# Altium PCB PCB3.PcbDoc
Units mil, origin at the board's own origin, x right, y up, seen from the top; angles counter-clockwise.
Board outline 1136.3 x 1744.47 mil, 2 copper layers (Top Layer, Bottom Layer); 11 components, 19 nets, 42 pads, 2 vias.
Unrouted connection lines stored in the file: 4.
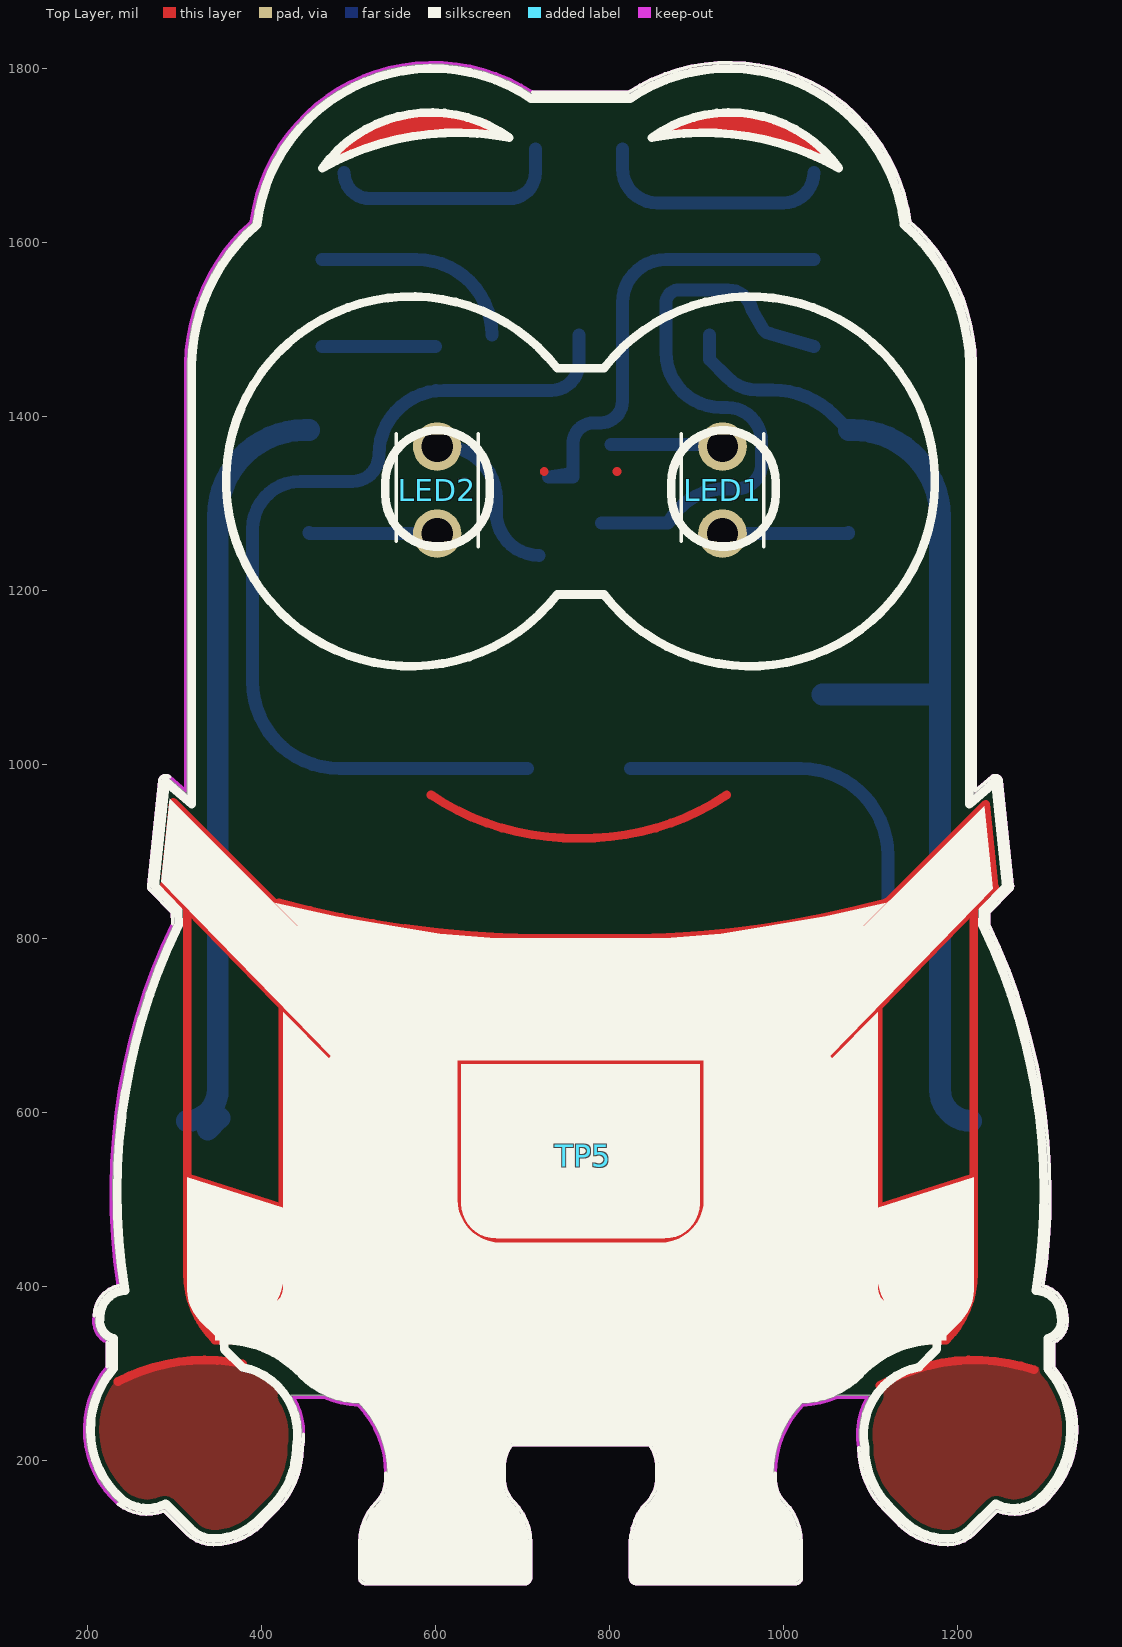
[diagram p0: Top Layer view]
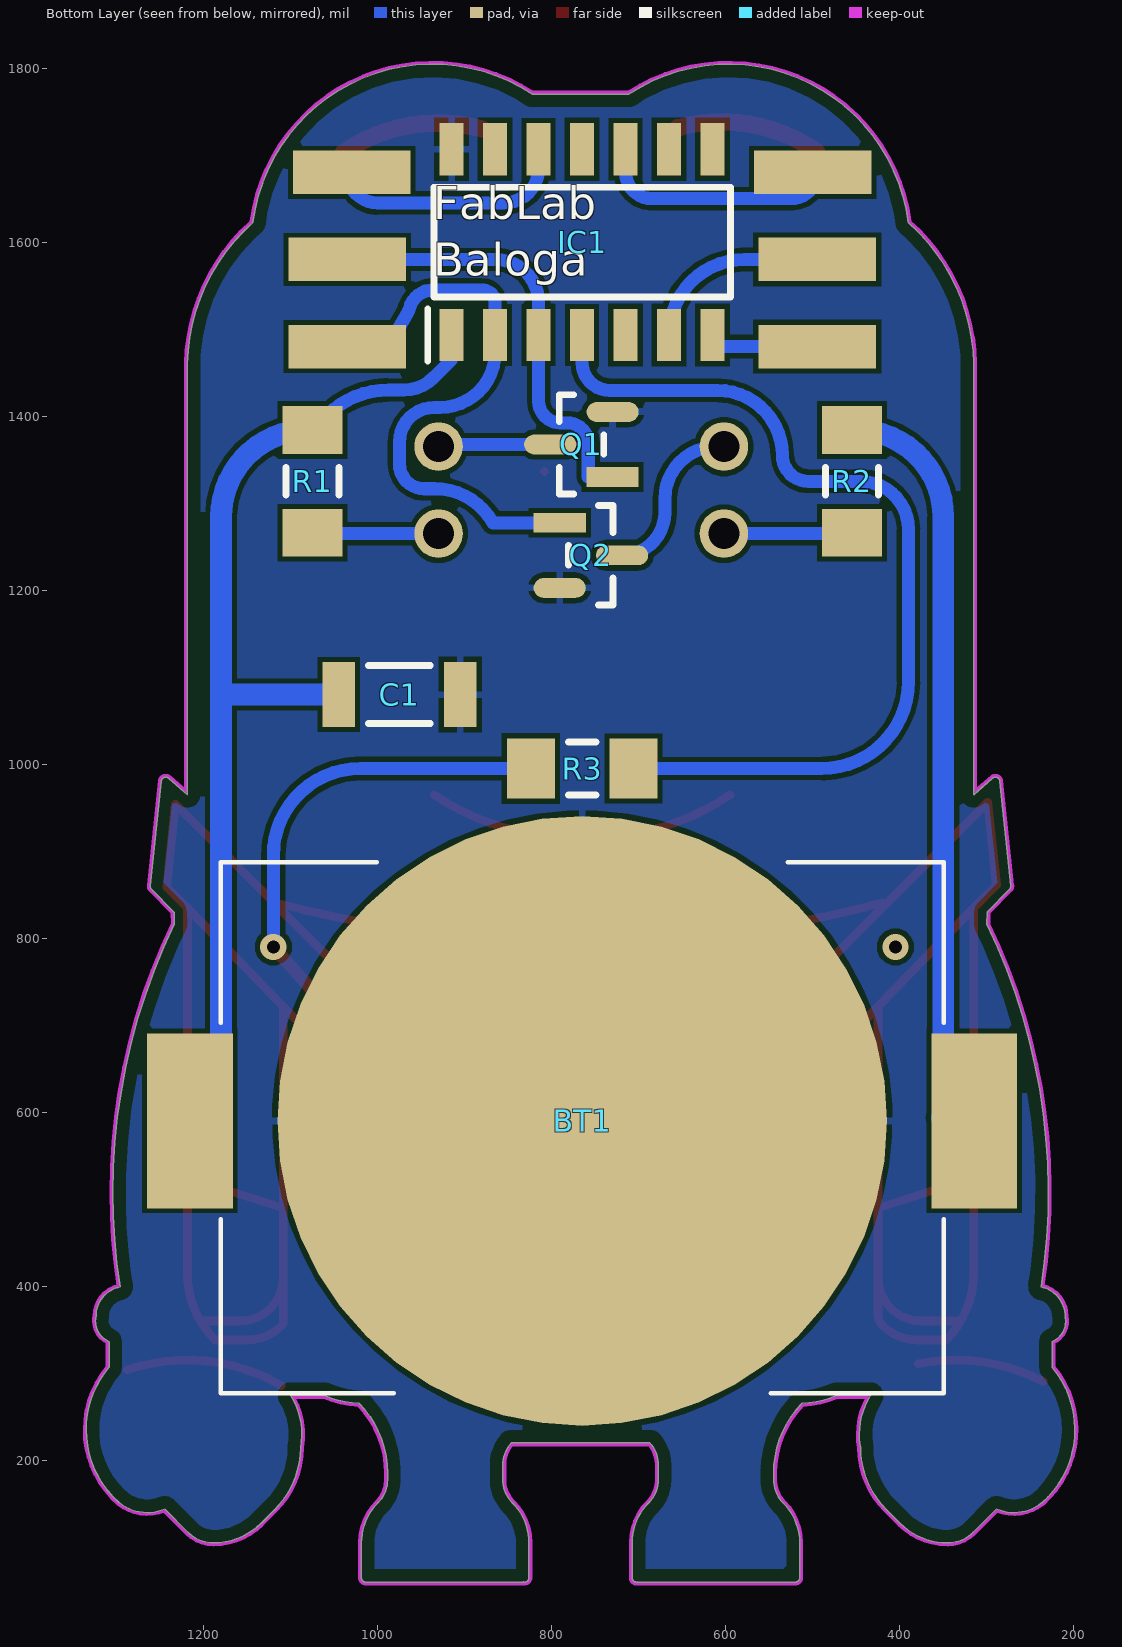
[diagram p1: Bottom Layer view, seen from below]
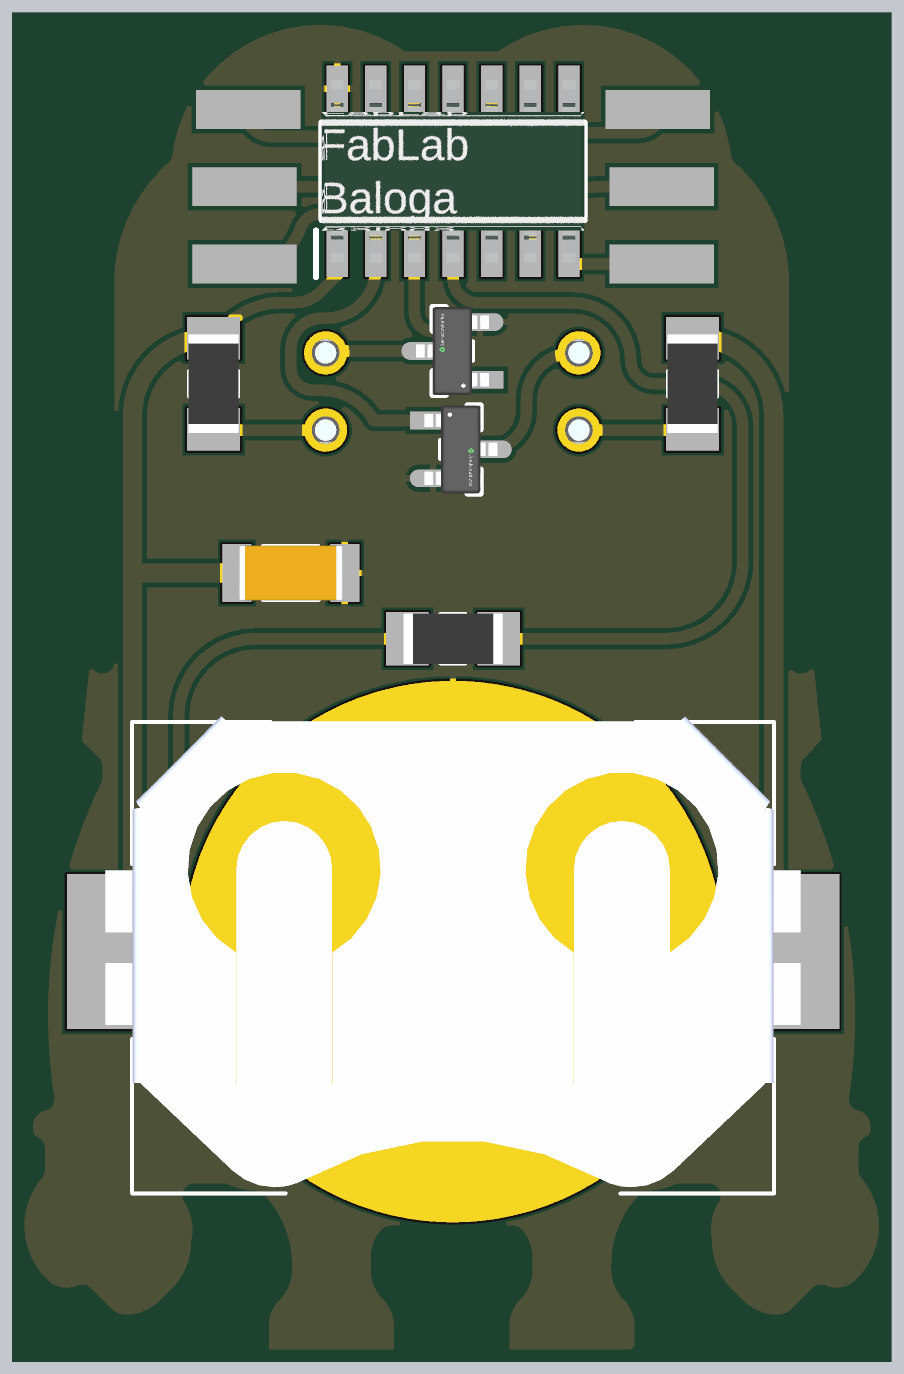
[diagram p2: 3D render of the assembled board from below, using the file's embedded part models]

## Layer stack, top to bottom
Top Solder: solder mask 0.4, Solder Resist, Dk 3.5
Top Layer: signal copper 1.4
Dielectric 1: dielectric 12.6, FR-4, Dk 4.8
Bottom Layer: signal copper 1.4
Bottom Solder: solder mask 0.4, Solder Resist, Dk 3.5

## Board outline
345,104.99 ccw(c345,182.43) 399.76,127.67 415.24,143.15 415.26,143.17 ccw(c343.43,215) 445.01,214.52 ccw(c362.93,230) 446.46,230 ccw(c362.93,230) 433.63,274.49 472.51,274.49 ccw(c514.64,366.92) 512.52,265.36 cw(c429.29,185) 544.99,185 544.99,177.43 cw(c507.93,177.43) 534.13,151.22 ccw(c580.36,105) 514.99,105 514.99,65 ccw(c520,65) 520,59.98 700,59.98 ccw(c700,65) 701.25,60.14 ccw(c702.5,65) 707.51,65 707.51,105 ccw(c642.14,105) 688.37,151.22 cw(c714.57,177.43) 677.51,177.43 677.51,194.82 cw(c715.18,194.82) 687.15,219.99 846.54,219.99 cw(c818.52,194.82) 856.18,194.82 856.18,177.43 cw(c819.13,177.43) 845.33,151.22 ccw(c891.55,105) 826.18,105 826.18,65 ccw(c831.2,65) 832.45,60.14 ccw(c833.7,65) 833.7,59.98 1013.7,59.98 ccw(c1013.7,65) 1018.71,65 1018.71,105 ccw(c953.34,105) 999.57,151.22 cw(c1025.77,177.43) 988.71,177.43 988.71,185 cw(c1104.41,185) 1021.18,265.36 ccw(c1019.05,366.92) 1061.19,274.49 1100.07,274.49 ccw(c1170.77,230) 1088.68,214.52 ccw(c1190.27,215) 1118.44,143.17 1118.45,143.15 1133.94,127.67 ccw(c1188.7,182.43) 1188.7,104.99 ccw(c1188.7,146.21) 1217.85,117.06 1244.75,143.96 ccw(c1264.87,190.83) 1296.84,151.09 ccw(c1293.71,154.99) 1297.03,151.25 ccw(c1223.7,235) 1335.01,235 ccw(c1223.7,235) 1308.71,306.86 1308.71,336.41 ccw(c1298.7,360) 1324.33,360 ccw(c1298.7,360) 1323.72,365.55 ccw(c1289.69,365.69) 1323.72,365.69 ccw(c1289.66,365.69) 1296.12,399.14 ccw(c594.79,507.5) 1304.44,507.5 ccw(c594.77,507.5) 1233.81,816.15 1234.03,829.86 1259.93,856.24 ccw(c1256.36,859.75) 1261.37,859.75 ccw(c1256.39,859.76) 1261.34,860.3 1248.69,980.5 ccw(c1243.7,980) 1240.41,983.79 1218.71,964.98 1218.71,1460 ccw(c1214.49,1460.01) 1218.71,1460.11 ccw(c995.73,1455.41) 1143.44,1622.51 ccw(c936.91,1596.3) 822.18,1770.02 711.52,1770.02 ccw(c596.78,1596.3) 390.25,1622.51 ccw(c537.96,1455.41) 314.99,1460.11 ccw(c319.87,1460) 314.98,1460 314.98,964.98 293.28,983.79 ccw(c290,980) 285.01,980.5 272.36,860.3 ccw(c277.34,859.75) 273.76,856.24 299.67,829.86 299.89,816.15 ccw(c938.93,507.5) 237.58,399.14 ccw(c244.04,365.69) 209.98,365.55 ccw(c235,360) 224.98,336.41 224.98,306.86 ccw(c310,235) 236.67,151.25 ccw(c242.77,158.19) 236.7,151.23 236.67,151.25 ccw(c240.1,155.12) 236.86,151.09 ccw(c268.83,190.83) 288.95,143.96 315.83,117.08 315.85,117.06 ccw(c345,146.21)

## Design rules (kind name [scope] priority, off if disabled: settings)
BoardOutlineClearance [All] p1: gap=15 ignorepadtopadclearanceinfootprint=FALSE
Clearance [All] p1: gap=6 ignorepadtopadclearanceinfootprint=FALSE except(0: Arc-Hole Track-Hole SMDPad-Hole THPad-Hole Via-Hole Fill-Hole Poly-Hole Region-Hole Text-Hole)
ComponentClearance [All] p1: gap=1 collisioncheckmode=3 verticalgap=1 showdistances=FALSE
DiffPairsRouting [All] p1: maxlimit=393.7 minlimit=6 mostfreqgap=8 toplayer_minwidth=6 toplayer_maxwidth=15 toplayer_prefwidth=8 bottomlayer_minwidth=6 bottomlayer_maxwidth=15 bottomlayer_prefwidth=8 maxuncoupledlength=500
HoleSize [All] p1: absolutevalues=TRUE maxlimit=265 minlimit=13 maxpercent=80.000 minpercent=20.000
HoleToHoleClearance [All] p1: gap=10 allowstackedmicrovias=FALSE
MinimumAnnularRing [All] p1: minimumring=7
MinimumSolderMaskSliver [All] p1: minsoldermaskwidth=0
PlaneClearance [All] p1: clearance=10
PlaneConnect [All] p1: planeconnectstyle=Direct reliefexpansion=16 reliefentries=4 reliefconductorwidth=6 reliefairgap=6
PolygonConnect [All] p1: connectstyle=Relief reliefconductorwidth=8 reliefentries=4 polygonreliefangle="90 Angle" airgapwidth=6
RoutingCorners [All] p1: cornerstyle=45-Degree minsetback=49.21 maxsetback=49.21
RoutingVias [All] p1: holewidth=15 width=30 viastyle="Through Hole" minholewidth=13 minwidth=27 maxholewidth=100 maxwidth=114
SilkToSilkClearance [All] p1: silktosilkclearance=0
SilkToSolderMaskClearance [IsPad] p1: minsilkscreentomaskgap=6 clearancetoexposedcopper=TRUE
SolderMaskExpansion [All] p1: expansion=2.95 istentingtop=FALSE
Width [All] p1: maxlimit=400 minlimit=6 preferedwidth=8
20 further rules are at their usual default settings.

## Classes and differential pairs
component class Sheet1: C1 IC1 LED1 LED2 Q1 Q2 R1 R2 R3 TP5

## Components (designator, comment, footprint, x,y, rotation, side; value= is the part's Value field where it differs from the comment)
BT1 "BAT-HLD-001" BAT_BAT-HLD-001 765,590 r180 bottom
C1 "Capacitor 1 uF +/- 10% 25 V 1206" CAPC3216X180X20ML20 975,1080 r180 bottom value=1µF
IC1 "ATTINY404-SSN" SOIC127P600X175-14N 765,1600 r90 bottom
LED1 "L-2060HD" L2060HD 930,1365 r0 top
LED2 "L-2060HD" L2060HD 602.1,1365 r0 top
Q1 "BSS138" FP-318-08-IPC_B 765.83,1367.4 r0 bottom
Q2 "BSS138" FP-318-08-IPC_B 755,1240 r180 bottom
R1 "Resistor 1k +/-1% 1206 250 mW" RESC3116X70X50ML13T20 1075,1325 r90 bottom value=30-70R
R2 "Resistor 1k +/-1% 1206 250 mW" RESC3116X70X50ML13T20 455,1325 r90 bottom value=30-70R
R3 "Resistor 1k +/-1% 1206 250 mW" RESC3116X70X50ML13T20 765,995 r0 bottom value=30-70R
TP5 "TPAD6R" TP06R 770,550 r90 top

## Footprints (in the part's own frame and the unit in brackets; to place one, negate y for a bottom-side part, rotate by r counter-clockwise, add the part's x,y. Pads: shape width x height; smd on the part's side, far side on the other; paste and mask are expansions set on the pad)
BAT_BAT-HLD-001 [mm]
  round 17.8 smd paste-10: N1(0,0)
  rect 2.5x5.1 smd: P1(-11.45,0) P2(11.45,0)
  silkscreen extent -10.55,-7.95 10.55,7.55, body extent -11.43,-7.75 11.43,7.75, height 4.32
CAPC3216X180X20ML20 [mm] "Chip Capacitor, 2-Leads, Body 3.40x1.80mm, IPC Low Density"
  rect 0.95x1.9 smd: 1(-1.775,0) 2(1.775,0)
  silkscreen extent -0.9,-0.85 0.9,0.85, body extent -1.7,-0.9 1.7,0.9, height 1.8
FP-318-08-IPC_B [mm]
  rect 1.524x0.578 smd paste+0 mask+0: 1(-0.91,0.95)
  rrect100% 1.524x0.578 smd paste+0 mask+0: 2(-0.91,-0.95) 3(0.91,0)
  silkscreen extent -0.65,-1.45 0.65,1.45, body extent -1.2,-1.45 1.2,1.45, height 1.11
L2060HD [mm]
  round 1.416 hole 0.91: 1(0,0) 2(0,-2.54)
  silkscreen extent -1.2,-2.92 1.2,0.38, body extent -1.2,-2.92 1.2,0.38, height 4.45
RESC3116X70X50ML13T20 [mm] "Chip Resistor, 2-Leads, Body 3.25x1.65mm, IPC Low Density"
  rect 1.4x1.75 smd: 1(-1.5,0) 2(1.5,0)
  silkscreen extent -0.4,-0.77 0.4,0.77, body extent -1.63,-0.82 1.63,0.82, height 0.7
SOIC127P600X175-14N [mm]
  rect 1.525x0.7 smd: 1(-2.712,3.81) 2(-2.712,2.54) 3(-2.712,1.27) 4(-2.712,0) 5(-2.712,-1.27) 6(-2.712,-2.54) 7(-2.712,-3.81) 8(2.712,-3.81) 9(2.712,-2.54) 10(2.712,-1.27) 11(2.712,0) 12(2.712,1.27) 13(2.712,2.54) 14(2.712,3.81)
  silkscreen extent -3.47,-4.33 1.6,4.51, body extent -3,-4.33 3,4.33, height 1.75
TP06R [mm] "Testpoint, round, d=0.6mm"
  round 0.6 smd paste-1: 1(0,0)

## Part data
BT1: "Battery Retainer Coin, 20.0mm 1 Cell SMD (SMT) Tab", Package=None, Availability=Unavailable, MF="{'manufacturer': u'Linx'}", MP=BAT-HLD-001, Price=None
C1: library part CMP-001-00006-5, "Chip Capacitor, 1 uF, +/- 10%, 25 V, 1206 (3216 Metric)", Capacitor Type=Ceramic, Case/Package=1206, Max Operating Temperature=125°C, Min Operating Temperature=-55°C, Tolerance=10%, Voltage Rating=25V, Mounting Technology=SM, Pins=2, RoHS Compliant=True
IC1: "Integrated Circuit", Manufacturer_Name=Microchip, Mouser Part Number=579-ATTINY404-SSN, Arrow Part Number=ATTINY404-SSN, Arrow Price/Stock=https://www.arrow.com/en/products/attiny404-ssn/microchip-technology?region=nac, Datasheet Link=https://componentsearchengine.com/Datasheets/2/ATTINY404-SSN.pdf, Height=1.75mm, Manufacturer_Part_Number=ATTINY404-SSN, Mouser Price/Stock=https://www.mouser.co.uk/ProductDetail/Microchip-Technology/ATTINY404-SSN?qs=3HJ2avRr9PJ8OrTjUlXZkg%3D%3D
LED1 LED2: "LED", Manufacturer_Name=Kingbright, Datasheet Link=https://componentsearchengine.com/Datasheets/2/L-2060HD.pdf, Height=4.35mm, Manufacturer_Part_Number=L-2060HD
Q1 Q2: library part CMP-07173-000101-1, "MOSFET N-CH 50V 220MA SOT-23", Case/Package=SOT-23, Continuous Drain Current (ID)=220mA, Drain to Source Breakdown Voltage=50V, Drain to Source Resistance=3.5R, Gate to Source Voltage (Vgs)=20V, Input Capacitance=27pF, Max Operating Temperature=150°C, Max Power Dissipation=360mW, Min Operating Temperature=-55°C, On-State Resistance=6R, Package Quantity=1, Threshold Voltage=1.3V, Contact Plating=Tin, Current Rating=220mA, Drain to Source Voltage (Vdss)=50V, Dual Supply Voltage=50V, Element Configuration=Single, Fall Time=9ns, Height=0.93mm, Lead Free="Lead Free", Length=2.92mm, Mount="Surface Mount", Nominal Vgs=1.3V, Number of Elements=1, Number of Pins=3, Packaging="Tape and Reel", Power Dissipation=360mW, Radiation Hardening=No, Rds On Max=3.5R, REACH SVHC="No SVHC", Rise Time=9ns, Termination=SMD/SMT, Turn-Off Delay Time=20ns, Turn-On Delay Time=2.5ns, Voltage Rating (DC)=50V, Weight=0.03g, Width=1.3mm
R1 R2 R3: library part CMP-009-00011-4, "Chip Resistor, 1 KOhm, +/- 1%, 0.25 W, -55 to 155 degC, 1206 (3216 Metric)", Case/Package=1206, Max Operating Temperature=155°C, Min Operating Temperature=-55°C, Power=250mW, Tolerance=1%, Voltage Rating=200V, Mounting Technology=SM, Pins=2, RoHS Compliant=True
TP5: library part CMP-00028-00002-1, "Touchpad", Pins=1

## Free pads (board coordinates)
  rect 135.04x50 smd far side paste+0 mask+0: 2(495,1580) 2(500,1680) 2(1030,1680) 2(1035,1480) 2(1035,1580) 3(495,1480)

## Via types
v1: diameter 30, hole 15, Top Layer to Bottom Layer, 2 vias

## Nets (pads, with @x,y where several pads share a name; then routed paths per layer and width w, separated by ;. In a path a pad name is that pad's centre, name@x,y a point inside that pad or via, vN(x,y) a via of type N, cw(c..) or ccw(c..) an arc to the next point about the centre after c; other vN are vias at no path point)
AIN4/PWM4: IC1.2 pad.2@1035,1480 Q2.1 | length 672.2
  Bottom Layer w15: Q2.1 867.61,1277.4 cw(c934.12,1240.46) 935.02,1316.54 946.54,1316.54 ccw(c946.54,1345) 975,1345 975,1370 ccw(c935,1370) 935,1410 928.23,1410 cw(c928.23,1473.23) 865,1473.23 IC1.2 865,1530 cw(c880,1530) 880,1545 936.37,1545 cw(c936.43,1517.16) 963.47,1523.78 ccw(c978.01,1527.47) 965,1520 976.5,1499.98 980.63,1495.85 984.32,1494.78 pad.2@1035,1480
AIN5/PWM5: IC1.3 pad.2@1035,1580 Q1.1 | length 535.8
  Bottom Layer w15: Q1.1@752.95,1333.6 cw(c730,1405) 752.58,1333.48 752.5,1333.48 Q1.1 758.04,1330 758.04,1370.14 cw(c782.21,1368.02) 782.21,1392.28 790.17,1392.28 ccw(c790.17,1417.11) 815,1417.11 IC1.3 815,1530 cw(c865,1530) 865,1580 pad.2@1035,1580
AIN6: IC1.4 R3.1 | length 1064.1
  Bottom Layer w15: R3.1 490,995 cw(c490,1095) 390,1095 390,1270 cw(c445,1270) 445,1325 505,1325 ccw(c505,1355) 535,1355 cw(c609.68,1355) 609.68,1429.68 733.36,1429.68 ccw(c733.36,1461.32) 765,1461.32 IC1.4
AIN7: IC1.5
EXTCLK/SCK: IC1.13
GND: BT1.N1 C1.2 IC1.14 Q1.2 Q2.2 | length 331.2
  Top Layer w10: 235.19,290.41 cw(c335.51,99.9) 378.7,310.83 ; 1110.93,286 cw(c1219.21,99.9) 1287.92,303.95
MISO: IC1.12 pad.2@1030,1680 | length 284.6
  Bottom Layer w15: IC1.12 815,1685 ccw(c855,1685) 855,1645 1000,1645 ccw(c1000,1680) pad.2@1035,1680
MOSI: IC1.11
NetLED1_1: LED1.1 Q1.3 | length 129.7
  Bottom Layer w15: Q1.3 927.6,1367.4 cw(c927.6,1365) LED1.1
NetLED1_2: LED1.2 R1.1 | length 145.5
  Bottom Layer w15: LED1.2 1074.06,1265 ccw(c1074.06,1265.94) R1.1
NetLED2_1: LED2.1 Q2.3 | length 195.2
  Bottom Layer w15: LED2.1 610,1365 cw(c610,1305) 670,1305 670,1289.17 ccw(c719.17,1289.17) Q2.3
NetLED2_2: LED2.2 R2.1 | length 147.6
  Bottom Layer w15: R2.1 ccw(c455.94,1265.94) 455.94,1265 LED2.2
NetR3_2: R3.2 TP5.1 | length 1782.9
  Top Layer w15: 880,525 v1(1120,790) ; 625,500 ccw(c675,500) 675,450 740,450 793.7,450 858.7,450 ccw(c858.7,500) 908.7,500 908.7,515 908.7,660 793.7,660 740,660 625,660 625,515 625,500
  Top Layer w25: 642.1,555 665,555
  Bottom Layer w15: R3.2 1020,995 cw(c1020,895) 1120,895 v1(1120,790)
  other v1: 405,790
RESET: IC1.10 pad.2@500,1680 | length 281
  Bottom Layer w15: pad.2@495,1680 ccw(c525,1680) 525,1650 685,1650 ccw(c685,1680) 715,1680 IC1.10
RxD: IC1.6 pad.2@495,1580 | length 244.5
  Bottom Layer w15: pad.2@470,1580 495,1580 578.23,1580 cw(c578.23,1493.23) IC1.6
SCL: IC1.8
SDA: IC1.9
TxD/PWM2: IC1.7 pad.3 | length 130
  Bottom Layer w15: pad.3@470,1480 pad.3 600,1480
VCC: BT1.P1 BT1.P2 C1.1 IC1.1 R1.2 R2.2 | length 2122.6
  Bottom Layer w15: IC1.1 915,1465 935.86,1444.14 ccw(c970,1478.28) 970,1430 987.63,1430 cw(c987.63,1330) 1058.34,1400.71 R1.2
  Bottom Layer w25: BT1.P2 ccw(c314.21,625.79) 350,625.79 350,1284.06 cw(c450,1284.06) 450,1384.06 R2.2 ; BT1.P2@338.43,580 BT1.P2@351.82,593.39 ; C1.1 1180,1080 ; R1.2 1080,1384.06 cw(c1080,1284.06) 1180,1284.06 1180,1080 ; BT1.P1 cw(c1215.79,625.79) 1180,625.79 1180,1080
copper on no net: | length 5303.3
  Top Layer w10: 315,525 425,490 ; 330,360 375,360 ccw(c375,410) 425,410 ; 420.27,840.9 ccw(c727.25,1966.16) 750,800 ; 425,720 425,490 ; 595.01,964.65 ccw(c758.8,1209.63) 765,915 ccw(c771.2,1209.63) 934.99,964.65 ; 745,800.09 793.49,800.09 cw(c793.49,799.79) 793.7,800 ccw(c811.45,1966.25) 1118.43,840.99 ; 1108.7,720 1108.7,490 ; 1203.7,360 1158.7,360 cw(c1158.7,410) 1108.7,410 ; 1218.7,525 1108.7,490 ; 315,835 480,665 520,735 298.81,956.19 288.81,861.19 315,835 ; 315,835 315,415 ccw(c423.64,415) 346.82,338.18 356.82,338.18 379.39,338.18 ccw(c379.39,395.61) 420,355 ccw(c407.93,367.07) 425,367.07 425,410 ; 425,410 425,490 ; 1108.7,410 1108.7,490 ; 1108.7,410 1108.7,358.14 ccw(c1113.14,358.14) 1110,355 ccw(c1150.61,395.61) 1150.61,338.18 1176.88,338.18 1186.88,338.18 ccw(c1110.06,415) 1218.7,415 1218.7,835 ; 1218.7,835 1053.7,665 1013.7,735 1232.5,953.8 1242.5,858.8 1218.7,835
  Top Layer w20: 495.65,1704.07 cw(c604.68,1546.8) 655.37,1731.34 ; 880,1730 cw(c930.68,1545.46) 1039.72,1702.73

## Polygon pours and split planes (outlines as drawn)
GND on Top Layer "NONET_L02_P-001" (solid, pour order 7): 274.07,307.26 cw(c282.74,298.59) 282.74,310.85 371.17,310.85 cw(c371.17,293.62) 385.73,302.85 433.6,275 441.98,105.85 205.79,105.85 205.79,265.85 228.19,288.26 cw(c274.07,242.38)
GND on Top Layer "NONET_L02_P-001" (solid, pour order 3): 1163.28,306.41 cw(c1171.95,297.74) 1171.95,310 1279.56,310 cw(c1279.56,275.86) 1303.7,300 1375,300 1375,105 1095,105 1095,265 1117.4,287.4 cw(c1163.28,241.53)
NetR3_2 on Top Layer "NetR3_2_L02_P-001" (solid, pour order 0): 625,660 625,500 ccw(c675,500) 675,450 860,450 ccw(c860,500) 910,500 910,660
GND on Bottom Layer "NONET_L02_P-001" (solid, pour order 1): 95,1860 95,70 110,55 1390,55 1390,1855 1380,1865 80,1865

## Keep-outs
Top Overlay:
  lines w3.94: 208.01,365.76 cw(c244.04,365.69) 235.35,400.66 ; 223.02,307.58 223.02,335.14 ; 297.91,816.59 297.72,829.04 272.36,854.86 cw(c277.34,859.75) 270.4,860.5 ; 448.43,230 cw(c362.93,230) 446.98,214.33 cw(c343.43,215) 416.65,141.78 ; 712.11,1771.98 821.59,1771.98 cw(c936.91,1596.3) 1145.3,1623.49 cw(c995.73,1455.41) 1220.68,1460.15 ; 990.68,185 990.68,177.43 ; 1086.72,214.33 ccw(c1190.27,215) 1117.04,141.78 ; 1220.68,1460 1220.68,969.3 1239.12,985.28 cw(c1243.7,980) 1250.65,980.71 ; 1298.32,149.77 ccw(c1223.7,235) 1298.33,149.77 ; 235.37,149.77 ccw(c242.77,158.19) 235.4,149.75 ; 235.37,149.77 ccw(c242.77,158.19) 235.37,149.77 ; 235.37,149.77 ccw(c242.77,158.19) 235.37,149.77 ; 235.37,149.77 ccw(c310,235) 235.37,149.77 ; 235.37,149.77 ccw(c240.1,155.12) 235.4,149.74 ; 235.37,149.77 ccw(c240.1,155.12) 235.37,149.77 ; 235.37,149.77 ccw(c240.1,155.12) 235.37,149.77 ; 235.37,149.77 ccw(c240.1,155.12) 235.37,149.77 ; 235.37,149.77 235.4,149.75 ; 235.4,149.75 ccw(c242.77,158.19) 235.4,149.74 ; 235.4,149.75 ccw(c236.7,151.23) 235.4,149.74 ; 235.38,149.77 ccw(c236.67,151.25) 235.4,149.75 ; 235.4,149.74 ccw(c240.1,155.12) 235.62,149.56 ; 235.62,149.56 ccw(c268.83,190.83) 288.49,141.64 314.43,115.7 ; 235.62,149.56 ccw(c236.86,151.09) 235.62,149.56 ; 270.4,860.51 ccw(c277.34,859.75) 270.4,860.5 ; 270.4,860.51 283.05,980.71 ; 270.4,860.5 270.4,860.51 ; 283.05,980.71 cw(c290,980) 294.57,985.28 ; 283.05,980.71 ccw(c290,980) 283.05,980.7 ; 283.05,980.71 283.05,980.71 ; 294.57,985.28 cw(c293.28,983.79) 294.58,985.27 294.57,985.28 ; 314.43,115.7 ccw(c315.83,117.08) 314.43,115.69 ; 314.44,115.68 ccw(c315.83,117.08) 314.45,115.68 ; 314.44,115.68 ccw(c315.83,117.08) 314.44,115.68 ; 314.45,115.68 ccw(c315.85,117.06) 314.45,115.67 ccw(c345,146.21) 345,103.02 ccw(c345,182.43) 401.15,126.27 ; 314.44,115.68 ccw(c315.85,117.06) 314.45,115.68 ; 314.43,115.69 ccw(c315.85,117.06) 314.44,115.68 ; 314.43,115.69 ccw(c315.85,117.06) 314.43,115.69 ; 314.43,115.7 314.43,115.69 ; 314.43,115.69 314.44,115.68 ; 314.43,115.69 314.45,115.68 ; 401.15,126.27 ccw(c399.76,127.67) 401.15,126.27 ; 401.15,126.27 416.63,141.75 ; 416.63,141.75 ccw(c415.26,143.17) 416.64,141.76 ; 416.64,141.76 ccw(c415.24,143.15) 416.65,141.77 ; 416.64,141.76 ccw(c415.24,143.15) 416.64,141.76 ; 416.63,141.75 ccw(c415.24,143.15) 416.63,141.75 ; 416.65,141.77 ccw(c415.26,143.17) 416.65,141.78 ; 416.65,141.77 ccw(c415.26,143.17) 416.65,141.78 ; 416.64,141.76 ccw(c415.26,143.17) 416.65,141.77 ; 416.64,141.76 ccw(c415.26,143.17) 416.64,141.76 ; 416.63,141.75 416.65,141.77 ; 416.64,141.76 416.64,141.76 ; 416.63,141.75 416.64,141.76 ; 513.02,105 cw(c580.36,105) 532.74,152.62 ccw(c507.93,177.43) 543.02,177.43 ; 513.02,105 513.02,105 ; 513.02,105 513.02,65 ccw(c520,65) 520,58.02 700,58.02 ccw(c700,65) 701.25,58.13 ccw(c702.5,65) 709.48,64.98 ; 543.02,177.45 ccw(c544.98,177.43) 543.02,177.43 ; 543.02,177.45 543.02,184.98 ; 543.02,177.43 543.02,177.45 ; 543.02,185 ccw(c544.98,185) 543.02,184.98 ; 543.02,184.98 543.02,185 ; 679.48,177.43 ccw(c677.51,177.43) 679.48,177.43 ; 679.48,177.43 ccw(c714.57,177.43) 689.76,152.62 ; 679.48,177.43 ccw(c677.51,177.43) 679.48,177.43 ; 679.48,177.43 679.48,177.43 ; 679.48,177.43 679.48,194.82 cw(c715.18,194.82) 688.05,218.02 845.65,218.02 cw(c818.52,194.82) 854.21,194.82 ; 679.48,177.43 679.48,177.43 ; 689.76,152.62 cw(c688.37,151.22) 689.78,152.6 ; 689.76,152.62 cw(c642.14,105) 689.78,152.6 ; 689.78,152.6 cw(c642.14,105) 709.48,105.02 ; 709.48,64.98 ccw(c707.51,65) 709.48,65 ; 709.48,64.98 ccw(c702.5,65) 709.48,65 ; 709.48,65 709.48,105 ; 709.48,105 ccw(c642.14,105) 709.48,105.02 ; 709.48,105 ccw(c707.51,105) 709.48,105.02 ; 824.21,105 cw(c891.55,105) 843.94,152.62 ccw(c819.13,177.43) 854.21,177.43 ; 824.21,105 824.21,105 ; 824.21,105 824.21,65 ccw(c831.2,65) 832.45,58.13 ccw(c833.7,65) 833.7,58.02 ; 833.7,58.02 ccw(c833.7,59.98) 833.7,58.02 ; 833.7,58.02 ccw(c833.7,59.98) 833.7,58.02 ; 833.7,58.02 1013.7,58.02 ccw(c1013.7,65) 1020.68,65 1020.68,105 ; 854.21,177.45 ccw(c856.18,177.43) 854.21,177.43 ; 854.21,177.45 854.21,194.8 ; 854.21,177.43 854.21,177.45 ; 854.21,194.82 ccw(c856.18,194.82) 854.21,194.8 ; 854.21,194.8 854.21,194.82 ; 990.68,177.43 ccw(c1025.77,177.43) 1000.96,152.62 ; 990.68,177.43 ccw(c988.71,177.43) 990.68,177.43 ; 990.68,177.43 ccw(c988.71,177.43) 990.68,177.43 ; 990.68,177.43 990.68,177.43 ; 990.68,177.43 990.68,177.43 ; 1000.97,152.6 ccw(c999.57,151.22) 1000.96,152.62 ; 1000.97,152.6 ccw(c953.34,105) 1000.96,152.62 ; 1000.97,152.6 cw(c953.34,105) 1020.68,105.02 ; 1020.68,105 ccw(c1018.71,105) 1020.68,105.02 ; 1020.68,105 ccw(c953.34,105) 1020.68,105.02 ; 1117.05,141.77 ccw(c1118.44,143.17) 1117.06,141.76 ; 1117.05,141.77 cw(c1118.44,143.17) 1117.04,141.78 ; 1117.06,141.76 ccw(c1118.45,143.15) 1117.06,141.76 ; 1117.05,141.77 ccw(c1118.45,143.15) 1117.06,141.76 ; 1117.05,141.77 cw(c1118.44,143.17) 1117.04,141.78 ; 1117.07,141.75 ccw(c1118.45,143.15) 1117.07,141.75 ; 1117.06,141.76 ccw(c1118.44,143.17) 1117.07,141.75 ; 1117.06,141.76 ccw(c1118.44,143.17) 1117.06,141.76 ; 1117.05,141.77 1117.07,141.75 ; 1117.07,141.75 1132.54,126.29 ; 1117.06,141.76 1117.06,141.76 ; 1117.06,141.76 1117.07,141.75 ; 1132.55,126.27 ccw(c1188.7,182.43) 1188.7,103.02 ccw(c1188.7,146.21) 1219.24,115.67 ; 1132.55,126.27 cw(c1133.94,127.67) 1132.54,126.29 ; 1132.55,126.27 1132.54,126.29 ; 1219.24,115.67 ccw(c1217.85,117.06) 1219.24,115.67 ; 1219.24,115.67 ccw(c1217.85,117.06) 1219.24,115.67 ; 1219.24,115.67 1245.21,141.64 ccw(c1264.87,190.83) 1298.08,149.56 ; 1250.65,980.7 ccw(c1243.7,980) 1250.65,980.71 ; 1250.65,980.71 1263.3,860.51 ; 1263.3,860.51 ccw(c1256.39,859.76) 1263.3,860.51 ; 1263.3,860.49 ccw(c1256.39,859.76) 1263.3,860.51 ; 1263.3,860.49 cw(c1256.39,859.76) 1263.34,859.76 ; 1263.3,860.49 ccw(c1261.34,860.3) 1263.3,860.51 ; 1263.34,859.75 ccw(c1256.39,859.76) 1263.34,859.76 ; 1263.34,859.75 cw(c1256.36,859.75) 1261.34,854.86 1235.98,829.04 1235.79,816.59 cw(c594.77,507.5) 1306.41,507.5 cw(c594.79,507.5) 1298.35,400.66 cw(c1289.66,365.69) 1325.69,365.76 cw(c1298.7,360) 1326.3,360 ; 1298.08,149.56 ccw(c1293.71,154.99) 1298.33,149.77 ; 1298.08,149.56 ccw(c1293.71,154.99) 1298.08,149.56 ; 1298.33,149.77 ccw(c1223.7,235) 1336.98,235 ccw(c1223.7,235) 1310.68,307.58 1310.68,335.14 ccw(c1298.7,360) 1326.3,360 ; 1298.33,149.77 ccw(c1293.71,154.99) 1298.33,149.77 ; 1326.3,360 ccw(c1324.33,360) 1326.3,360 ; 1326.3,360 ccw(c1324.33,360) 1326.3,360
Keep-Out Layer:
  lines w3.94: 1298.32,149.77 ccw(c1223.7,235) 1298.33,149.77 ; 235.37,149.77 ccw(c242.77,158.19) 235.4,149.75 ; 235.37,149.77 ccw(c242.77,158.19) 235.37,149.77 ; 235.37,149.77 ccw(c242.77,158.19) 235.37,149.77 ; 235.37,149.77 ccw(c310,235) 235.37,149.77 ; 235.37,149.77 cw(c310,235) 223.02,307.58 223.02,335.14 cw(c235,360) 208.01,365.76 cw(c244.04,365.69) 235.35,400.66 cw(c938.93,507.5) 297.91,816.59 297.72,829.04 272.36,854.86 cw(c277.34,859.75) 270.4,860.5 ; 235.37,149.77 ccw(c240.1,155.12) 235.4,149.74 ; 235.37,149.77 ccw(c240.1,155.12) 235.37,149.77 ; 235.37,149.77 ccw(c240.1,155.12) 235.37,149.77 ; 235.37,149.77 ccw(c240.1,155.12) 235.37,149.77 ; 235.37,149.77 235.4,149.75 ; 235.4,149.75 ccw(c242.77,158.19) 235.4,149.74 ; 235.4,149.75 ccw(c236.7,151.23) 235.4,149.74 ; 235.38,149.77 ccw(c236.67,151.25) 235.4,149.75 ; 235.4,149.74 ccw(c240.1,155.12) 235.62,149.56 ; 235.62,149.56 ccw(c268.83,190.83) 288.49,141.64 314.43,115.7 ; 235.62,149.56 ccw(c236.86,151.09) 235.62,149.56 ; 270.4,860.51 ccw(c277.34,859.75) 270.4,860.5 ; 270.4,860.5 270.4,860.51 ; 270.4,860.51 283.05,980.71 ; 283.05,980.71 ccw(c290,980) 283.05,980.7 ; 283.05,980.71 cw(c290,980) 294.57,985.28 ; 283.05,980.71 283.05,980.71 ; 294.57,985.28 cw(c293.28,983.79) 294.58,985.27 ; 294.57,985.28 294.58,985.27 ; 294.58,985.27 313.02,969.3 313.02,1460 ; 313.02,1460 ccw(c319.87,1460) 313.02,1460 ; 313.02,1460 cw(c319.87,1460) 313.02,1460.15 cw(c537.96,1455.41) 388.4,1623.49 cw(c596.78,1596.3) 712.11,1771.98 821.59,1771.98 cw(c936.91,1596.3) 1145.3,1623.49 cw(c995.73,1455.41) 1220.68,1460.15 ; 313.02,1460 313.02,1460 ; 314.43,115.7 ccw(c315.83,117.08) 314.43,115.69 ; 314.44,115.68 ccw(c315.83,117.08) 314.45,115.68 ; 314.44,115.68 ccw(c315.83,117.08) 314.44,115.68 ; 314.45,115.68 ccw(c315.85,117.06) 314.45,115.67 ccw(c345,146.21) 345,103.02 ccw(c345,182.43) 401.15,126.27 ; 314.44,115.68 ccw(c315.85,117.06) 314.45,115.68 ; 314.43,115.69 ccw(c315.85,117.06) 314.44,115.68 ; 314.43,115.69 ccw(c315.85,117.06) 314.43,115.69 ; 314.43,115.7 314.43,115.69 ; 314.43,115.69 314.44,115.68 ; 314.43,115.69 314.45,115.68 ; 401.15,126.27 ccw(c399.76,127.67) 401.15,126.27 ; 401.15,126.27 416.63,141.75 ; 416.65,141.77 ccw(c415.26,143.17) 416.65,141.78 ; 416.65,141.77 ccw(c415.26,143.17) 416.65,141.78 ; 416.64,141.76 ccw(c415.26,143.17) 416.65,141.77 ; 416.64,141.76 ccw(c415.26,143.17) 416.64,141.76 ; 416.63,141.75 ccw(c415.26,143.17) 416.64,141.76 ; 416.64,141.76 ccw(c415.24,143.15) 416.65,141.77 ; 416.64,141.76 ccw(c415.24,143.15) 416.64,141.76 ; 416.63,141.75 ccw(c415.24,143.15) 416.63,141.75 ; 416.63,141.75 416.65,141.77 ; 416.64,141.76 416.64,141.76 ; 416.63,141.75 416.64,141.76 ; 416.65,141.78 ccw(c343.43,215) 446.98,214.33 ccw(c362.93,230) 448.43,230 ccw(c362.93,230) 437.11,272.52 472.08,272.52 ccw(c514.64,366.92) 511.66,263.41 cw(c429.29,185) 543.02,185 ; 513.02,105 cw(c580.36,105) 532.74,152.62 ccw(c507.93,177.43) 543.02,177.43 ; 513.02,105 513.02,105 ; 513.02,105 513.02,65 ccw(c520,65) 520,58.02 700,58.02 ccw(c700,65) 701.25,58.13 ccw(c702.5,65) 709.48,64.98 ; 543.02,177.45 ccw(c544.98,177.43) 543.02,177.43 ; 543.02,177.45 543.02,184.98 ; 543.02,177.43 543.02,177.45 ; 543.02,185 ccw(c544.98,185) 543.02,184.98 ; 543.02,184.98 543.02,185 ; 679.48,177.43 ccw(c677.51,177.43) 679.48,177.43 ; 679.48,177.43 ccw(c714.57,177.43) 689.76,152.62 ; 679.48,177.43 ccw(c677.51,177.43) 679.48,177.43 ; 679.48,177.43 679.48,194.82 cw(c715.18,194.82) 688.05,218.02 845.65,218.02 cw(c818.52,194.82) 854.21,194.82 ; 679.48,177.43 679.48,177.43 ; 679.48,177.43 679.48,177.43 ; 689.76,152.62 cw(c688.37,151.22) 689.78,152.6 ; 689.76,152.62 cw(c642.14,105) 689.78,152.6 ; 689.78,152.6 cw(c642.14,105) 709.48,105.02 ; 709.48,64.98 ccw(c707.51,65) 709.48,65 ; 709.48,64.98 ccw(c702.5,65) 709.48,65 ; 709.48,65 709.48,105 ; 709.48,105 ccw(c642.14,105) 709.48,105.02 ; 709.48,105 ccw(c707.51,105) 709.48,105.02 ; 824.21,105 cw(c891.55,105) 843.94,152.62 ccw(c819.13,177.43) 854.21,177.43 ; 824.21,105 824.21,105 ; 824.21,105 824.21,65 ccw(c831.2,65) 832.45,58.13 ccw(c833.7,65) 833.7,58.02 ; 833.7,58.02 ccw(c833.7,59.98) 833.7,58.02 ; 833.7,58.02 ccw(c833.7,59.98) 833.7,58.02 ; 833.7,58.02 1013.7,58.02 ccw(c1013.7,65) 1020.68,65 1020.68,105 ; 854.21,177.45 ccw(c856.18,177.43) 854.21,177.43 ; 854.21,177.45 854.21,194.8 ; 854.21,177.43 854.21,177.45 ; 854.21,194.82 ccw(c856.18,194.82) 854.21,194.8 ; 854.21,194.8 854.21,194.82 ; 990.68,177.43 ccw(c1025.77,177.43) 1000.96,152.62 ; 990.68,177.43 ccw(c988.71,177.43) 990.68,177.43 ; 990.68,177.43 ccw(c988.71,177.43) 990.68,177.43 ; 990.68,177.43 990.68,185 cw(c1104.41,185) 1022.04,263.41 ccw(c1019.05,366.92) 1061.62,272.52 1096.59,272.52 ccw(c1170.77,230) 1086.72,214.33 ccw(c1190.27,215) 1117.04,141.78 ; 990.68,177.43 990.68,177.43 ; 990.68,177.43 990.68,177.43 ; 1000.97,152.6 ccw(c953.34,105) 1000.96,152.62 ; 1000.97,152.6 cw(c953.34,105) 1020.68,105.02 ; 1000.97,152.6 ccw(c999.57,151.22) 1000.96,152.62 ; 1020.68,105 ccw(c953.34,105) 1020.68,105.02 ; 1020.68,105 ccw(c1018.71,105) 1020.68,105.02 ; 1117.06,141.76 ccw(c1118.45,143.15) 1117.06,141.76 ; 1117.05,141.77 ccw(c1118.45,143.15) 1117.06,141.76 ; 1117.05,141.77 cw(c1118.44,143.17) 1117.04,141.78 ; 1117.07,141.75 ccw(c1118.45,143.15) 1117.07,141.75 ; 1117.06,141.76 ccw(c1118.44,143.17) 1117.07,141.75 ; 1117.06,141.76 ccw(c1118.44,143.17) 1117.06,141.76 ; 1117.05,141.77 ccw(c1118.44,143.17) 1117.06,141.76 ; 1117.05,141.77 cw(c1118.44,143.17) 1117.04,141.78 ; 1117.06,141.76 1117.06,141.76 ; 1117.06,141.76 1117.07,141.75 ; 1117.07,141.75 1132.54,126.29 ; 1117.05,141.77 1117.07,141.75 ; 1132.55,126.27 ccw(c1188.7,182.43) 1188.7,103.02 ccw(c1188.7,146.21) 1219.24,115.67 ; 1132.55,126.27 cw(c1133.94,127.67) 1132.54,126.29 ; 1132.55,126.27 1132.54,126.29 ; 1219.24,115.67 ccw(c1217.85,117.06) 1219.24,115.67 ; 1219.24,115.67 ccw(c1217.85,117.06) 1219.24,115.67 ; 1219.24,115.67 1245.21,141.64 ccw(c1264.87,190.83) 1298.08,149.56 ; 1220.68,1460.02 ccw(c1214.49,1460.01) 1220.68,1460.15 ; 1220.68,1460.01 ccw(c1214.49,1460.01) 1220.68,1460.02 ; 1220.68,1460 ccw(c1214.49,1460.01) 1220.68,1460.01 ; 1220.68,1460 ccw(c1214.49,1460.01) 1220.68,1460 ; 1220.68,1460.02 ccw(c1218.71,1460) 1220.68,1460.08 ; 1220.68,1460 ccw(c1218.71,1460) 1220.68,1460.02 ; 1220.68,1460 1220.68,969.3 1239.12,985.28 cw(c1243.7,980) 1250.65,980.71 ; 1220.68,1460.11 ccw(c1218.71,1460.11) 1220.68,1460.15 ; 1220.68,1460.08 ccw(c1218.71,1460.11) 1220.68,1460.11 ; 1250.65,980.7 ccw(c1243.7,980) 1250.65,980.71 ; 1250.65,980.71 1263.3,860.51 ; 1263.3,860.51 ccw(c1256.39,859.76) 1263.3,860.51 ; 1263.3,860.49 ccw(c1256.39,859.76) 1263.3,860.51 ; 1263.3,860.49 cw(c1256.39,859.76) 1263.34,859.76 ; 1263.3,860.49 ccw(c1261.34,860.3) 1263.3,860.51 ; 1263.34,859.75 ccw(c1256.39,859.76) 1263.34,859.76 ; 1263.34,859.75 cw(c1256.36,859.75) 1261.34,854.86 1235.98,829.04 1235.79,816.59 cw(c594.77,507.5) 1306.41,507.5 cw(c594.79,507.5) 1298.35,400.66 cw(c1289.66,365.69) 1325.69,365.76 cw(c1298.7,360) 1326.3,360 ; 1298.08,149.56 ccw(c1293.71,154.99) 1298.33,149.77 ; 1298.08,149.56 ccw(c1293.71,154.99) 1298.08,149.56 ; 1298.33,149.77 ccw(c1223.7,235) 1336.98,235 ccw(c1223.7,235) 1310.68,307.58 1310.68,335.14 ccw(c1298.7,360) 1326.3,360 ; 1298.33,149.77 ccw(c1293.71,154.99) 1298.33,149.77 ; 1326.3,360 ccw(c1324.33,360) 1326.3,360 ; 1326.3,360 ccw(c1324.33,360) 1326.3,360

## Silkscreen, mask and mechanical layers (free items; w line width, h text height)
Top Overlay:
  drawing of 111 lines, arcs and shapes, not listed
Bottom Overlay:
  text "FabLab / Baloga" at 936.43,1548.42 h65
Top Solder:
  lines w10: 315,525 425,490 ; 330,360 375,360 ccw(c375,410) 425,410 ; 420.27,840.9 ccw(c727.25,1966.16) 750,800 ; 425,720 425,490 ; 595.01,964.65 ccw(c758.8,1209.63) 765,915 ccw(c771.2,1209.63) 934.99,964.65 ; 745,800.09 793.49,800.09 cw(c793.49,799.79) 793.7,800 ccw(c811.45,1966.25) 1118.43,840.99 ; 1108.7,720 1108.7,490 ; 1203.7,360 1158.7,360 cw(c1158.7,410) 1108.7,410 ; 1218.7,525 1108.7,490 ; 315,835 480,665 520,735 298.81,956.19 288.81,861.19 315,835 ; 315,835 315,415 ccw(c423.64,415) 346.82,338.18 356.82,338.18 379.39,338.18 ccw(c379.39,395.61) 420,355 ccw(c407.93,367.07) 425,367.07 425,410 ; 405,1336.25 cw(c565,1336.25) 725,1336.25 ; 405,1336.24 ccw(c405,1336.25) 405,1336.25 ; 405,1336.24 405,1304.92 ccw(c565,1304.92) 725,1304.92 725,1336.24 ; 425,410 425,490 ; 725,1336.24 ccw(c725,1336.25) 725,1336.25 ; 725,1336.24 ccw(c725,1336.25) 725,1336.25 ; 808.69,1336.25 cw(c968.7,1336.25) 1128.7,1336.25 ; 808.69,1336.25 ccw(c808.7,1336.25) 808.7,1336.24 ; 808.69,1336.25 ccw(c808.7,1336.25) 808.7,1336.24 ; 808.7,1336.24 808.7,1304.92 ccw(c968.7,1304.92) 1128.7,1304.92 1128.7,1336.24 ; 1108.7,410 1108.7,490 ; 1108.7,410 1108.7,358.14 ccw(c1113.14,358.14) 1110,355 ccw(c1150.61,395.61) 1150.61,338.18 1176.88,338.18 1186.88,338.18 ccw(c1110.06,415) 1218.7,415 1218.7,835 ; 1128.7,1336.25 ccw(c1128.7,1336.25) 1128.7,1336.24 ; 1218.7,835 1053.7,665 1013.7,735 1232.5,953.8 1242.5,858.8 1218.7,835
  lines w15: 625,500 ccw(c675,500) 675,450 740,450 793.7,450 858.7,450 ccw(c858.7,500) 908.7,500 908.7,515 908.7,660 793.7,660 740,660 625,660 625,515 625,500
Mechanical 1:
  lines w10: 442.18,302.82 446.36,298.64 ; 1087.34,298.64 1091.52,302.82